# Altium PCB PCB1.PcbDoc
Units mm, origin at the board's own origin, x right, y up, seen from the top; angles counter-clockwise.
Board outline 100 x 100 mm, 4 copper layers (Top Layer, Internal Plane 1, Internal Plane 2, Bottom Layer), stack 0.462 mm thick; 31 components, 16 nets, 101 pads, 0 vias.
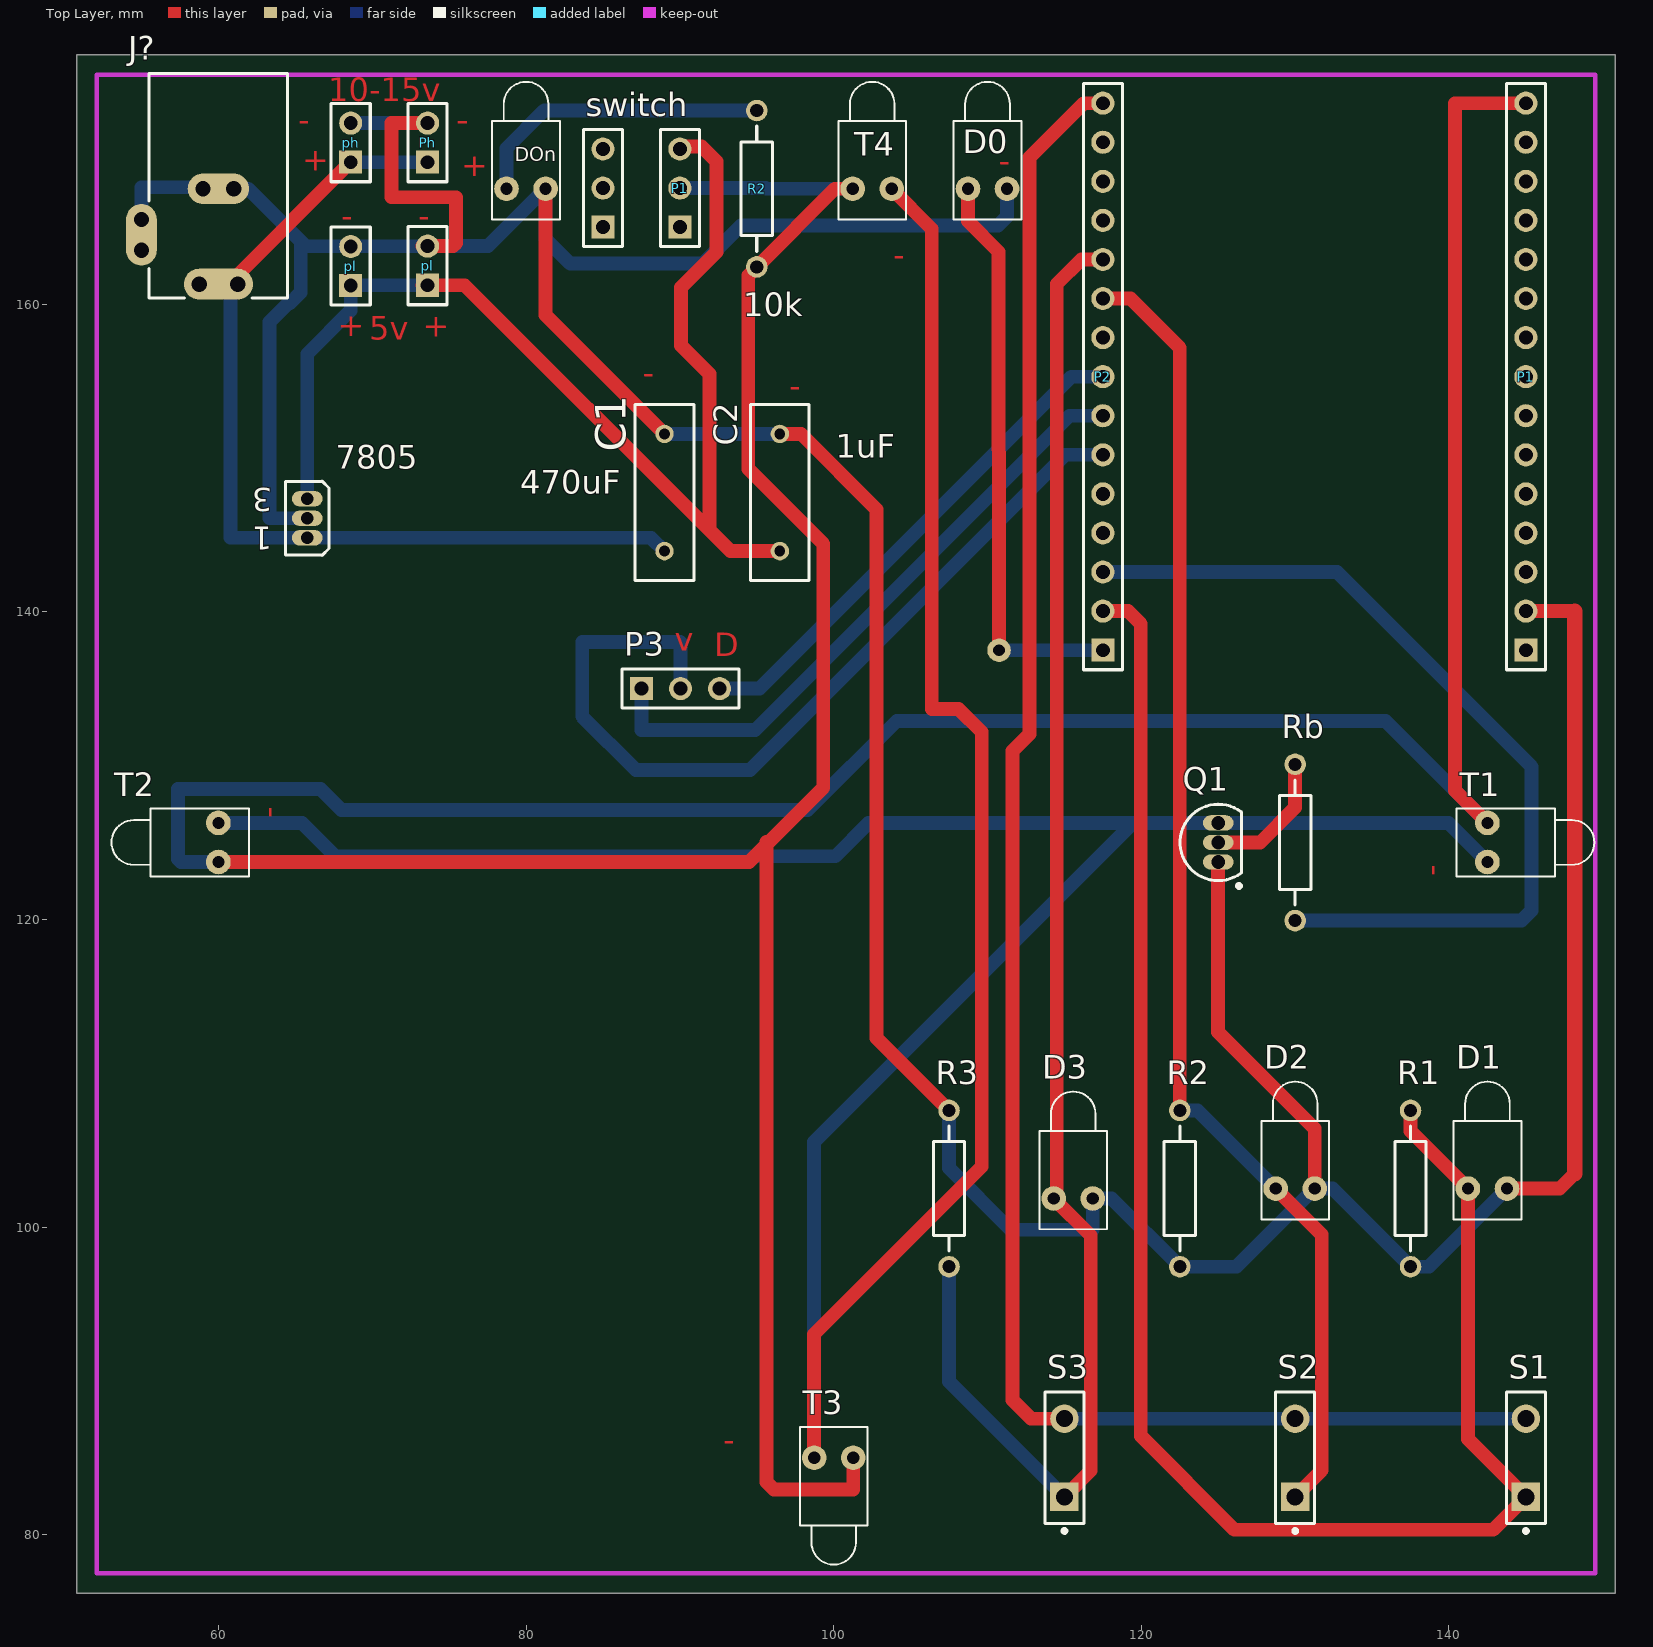
[diagram p0: Top Layer view]
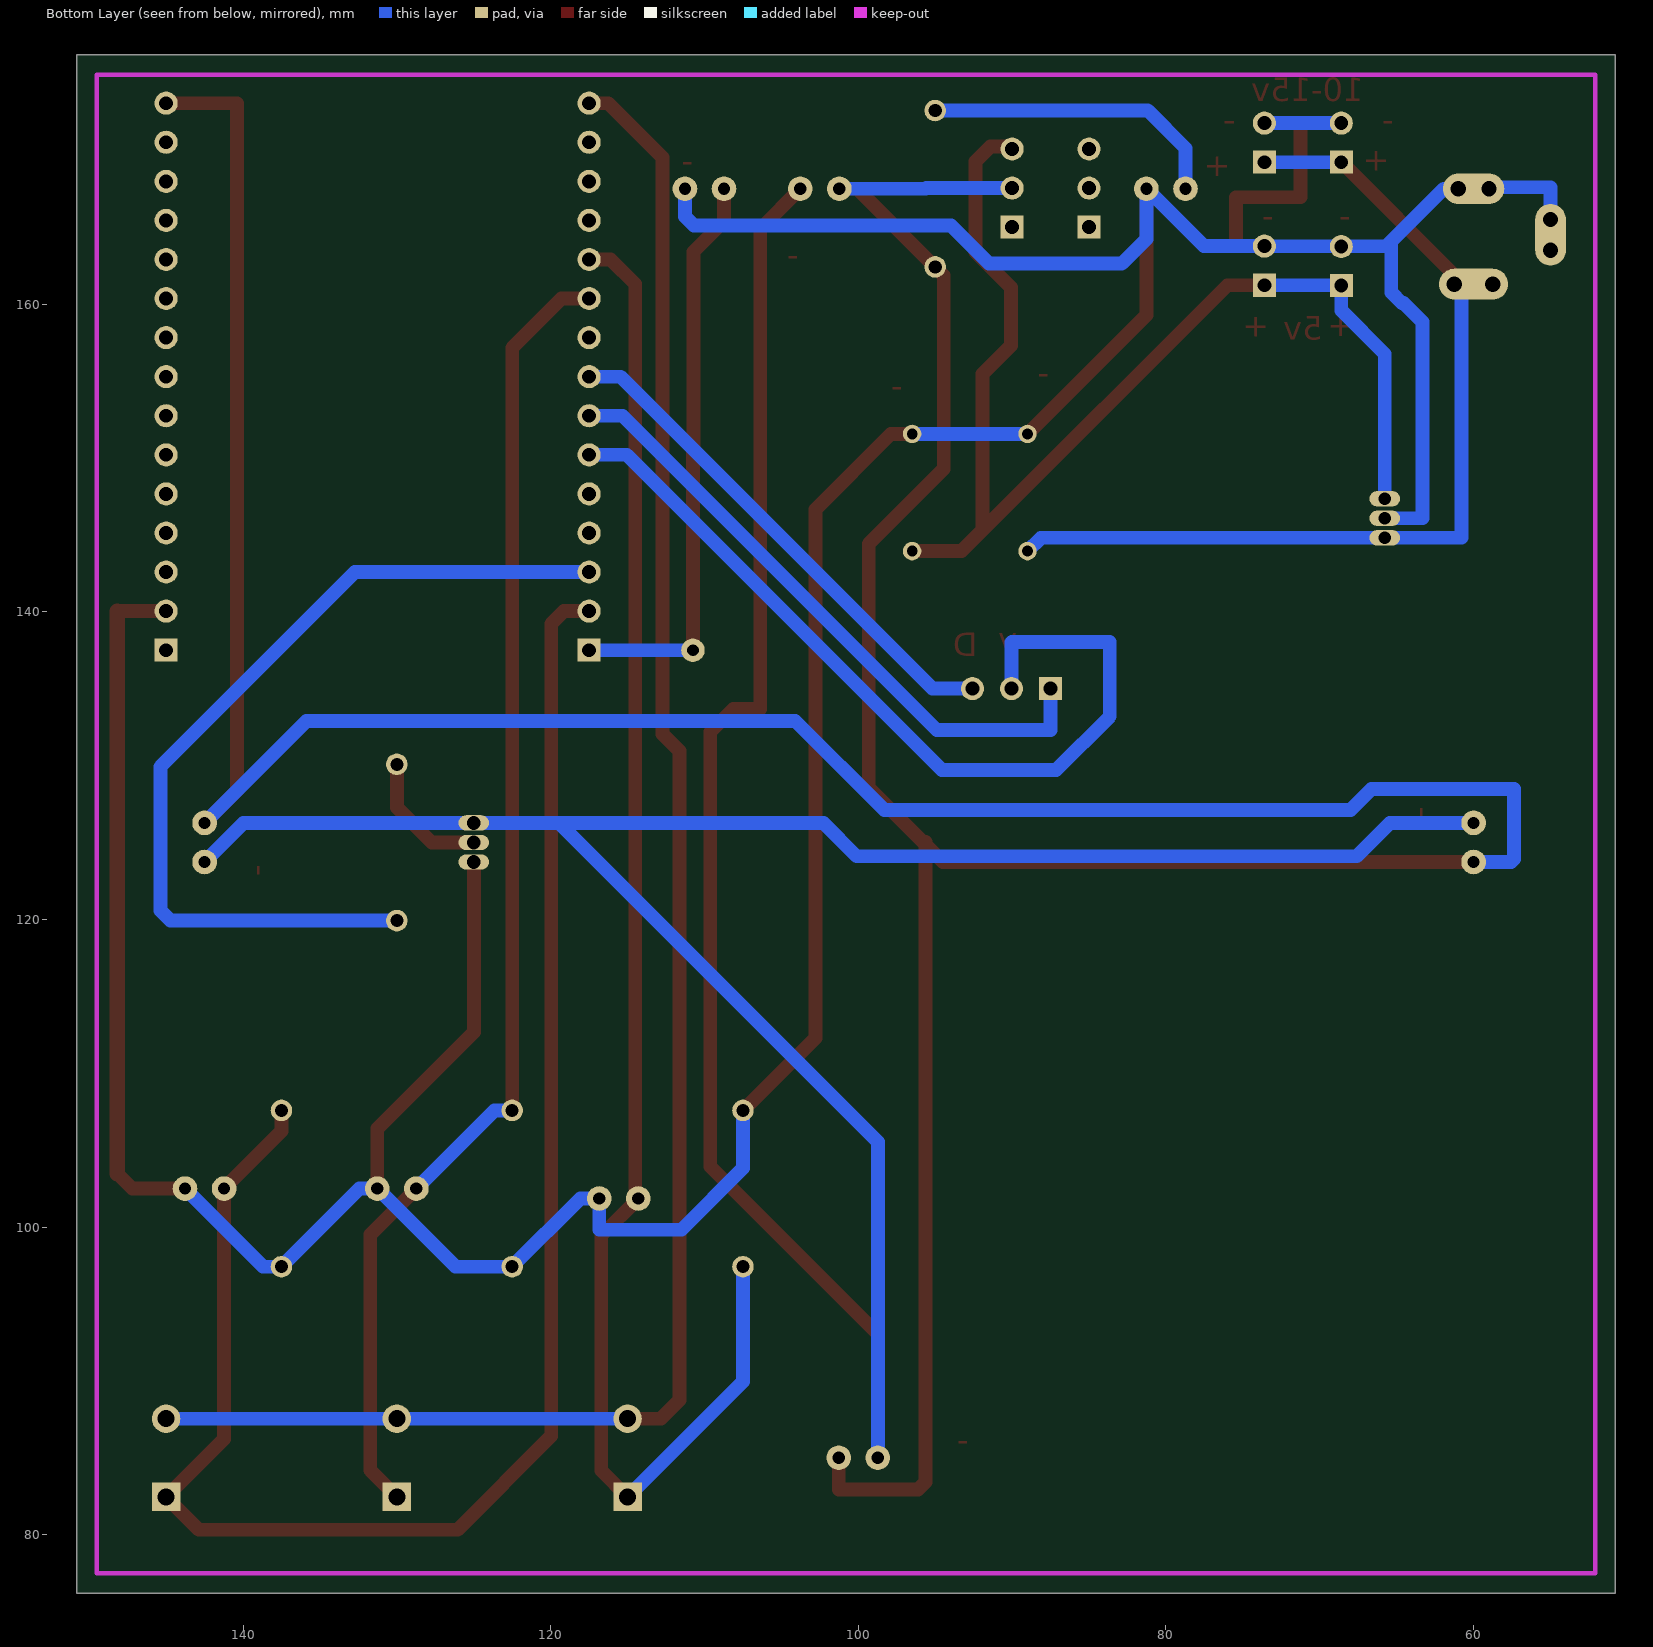
[diagram p1: Bottom Layer view, seen from below]
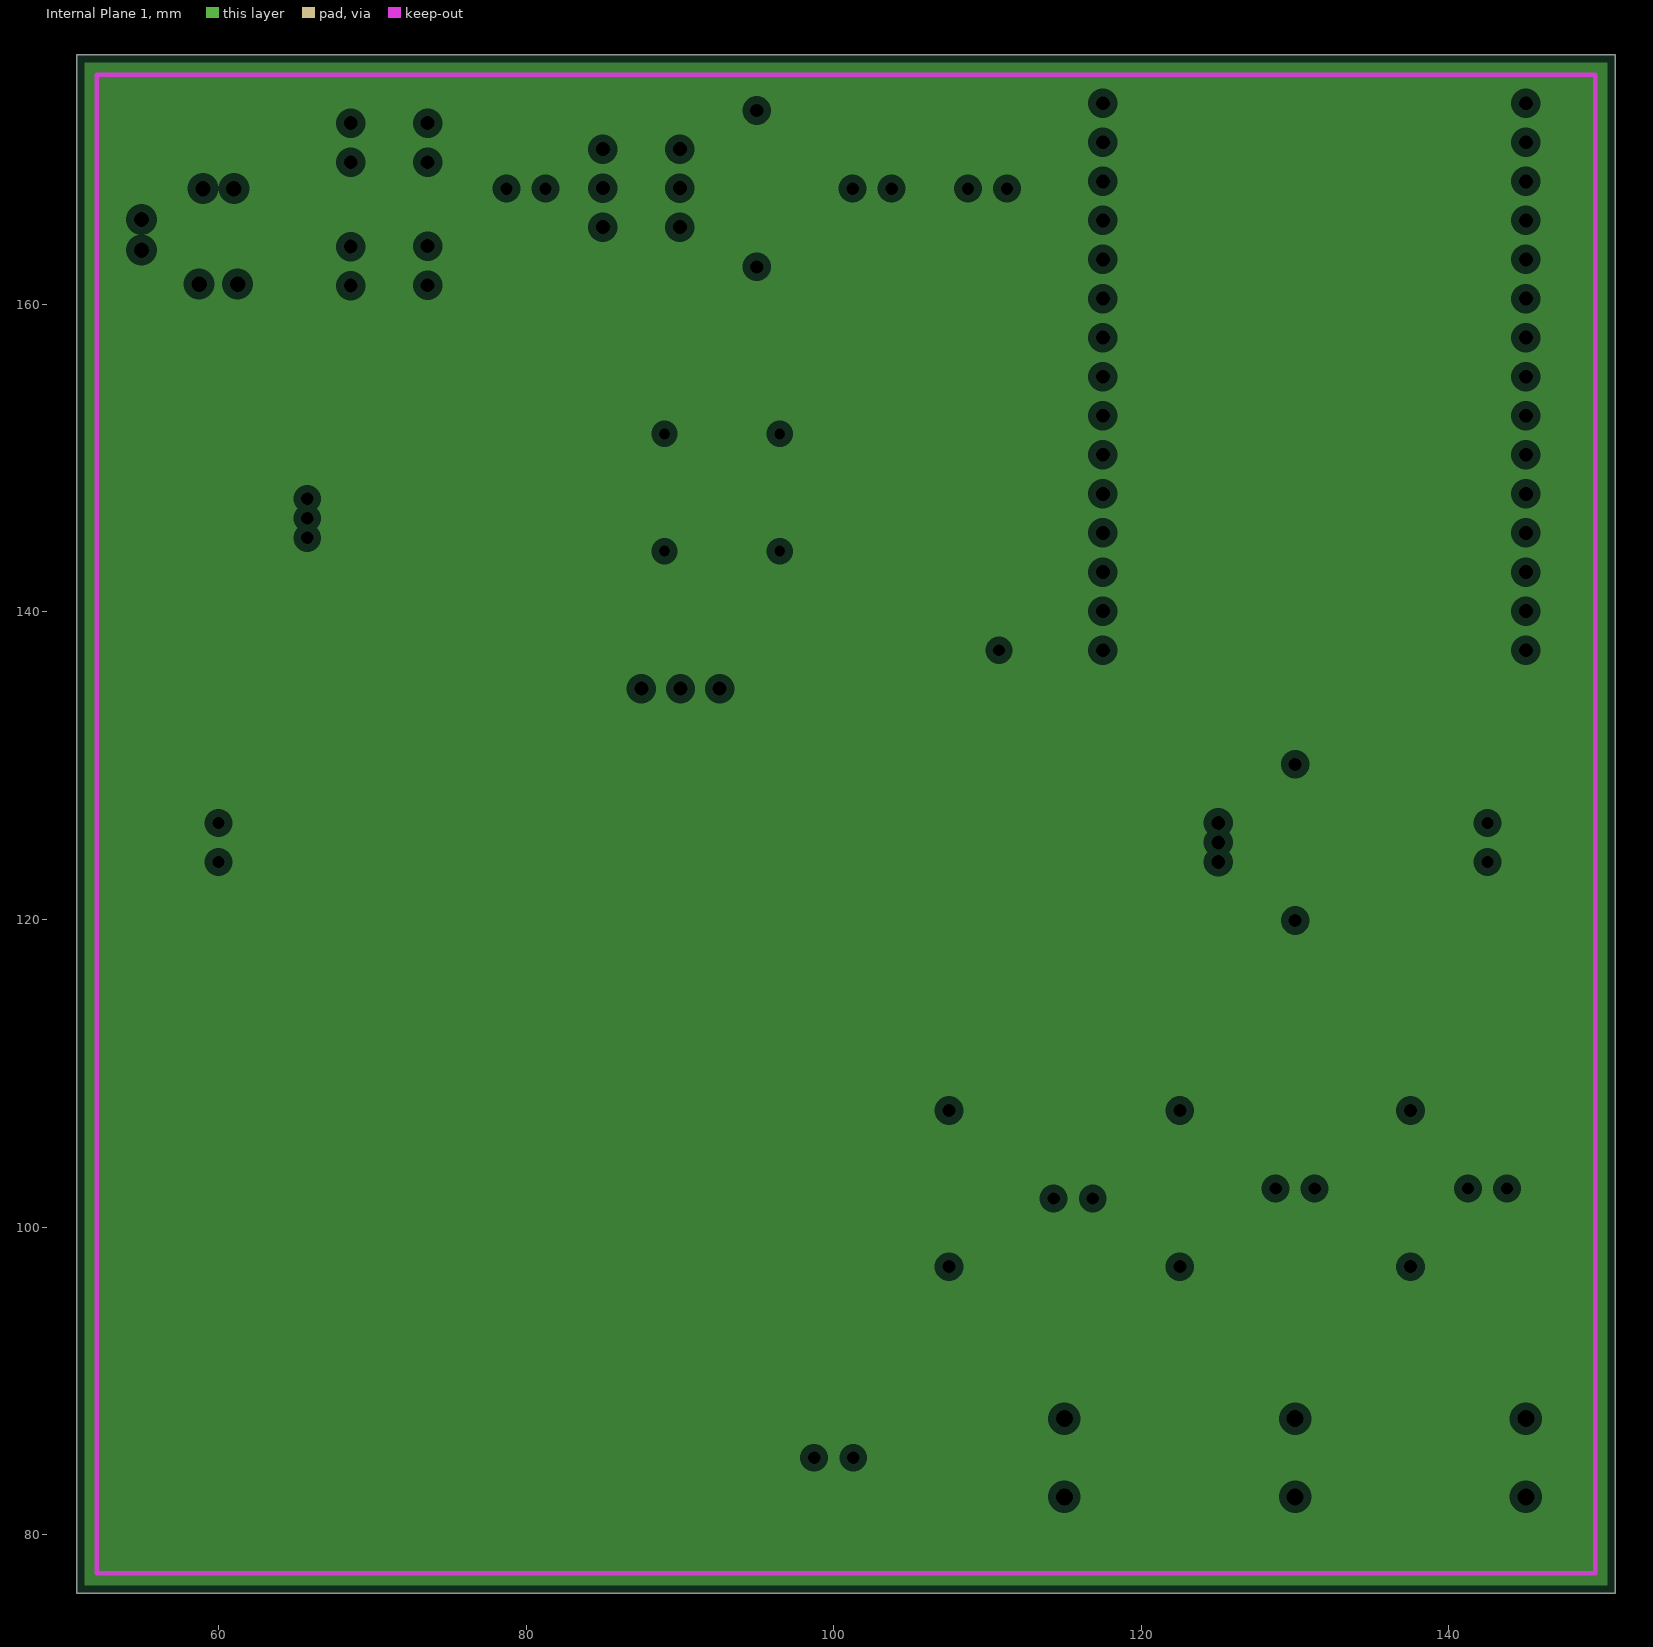
[diagram p2: Internal Plane 1, clearances drawn from the general rule]
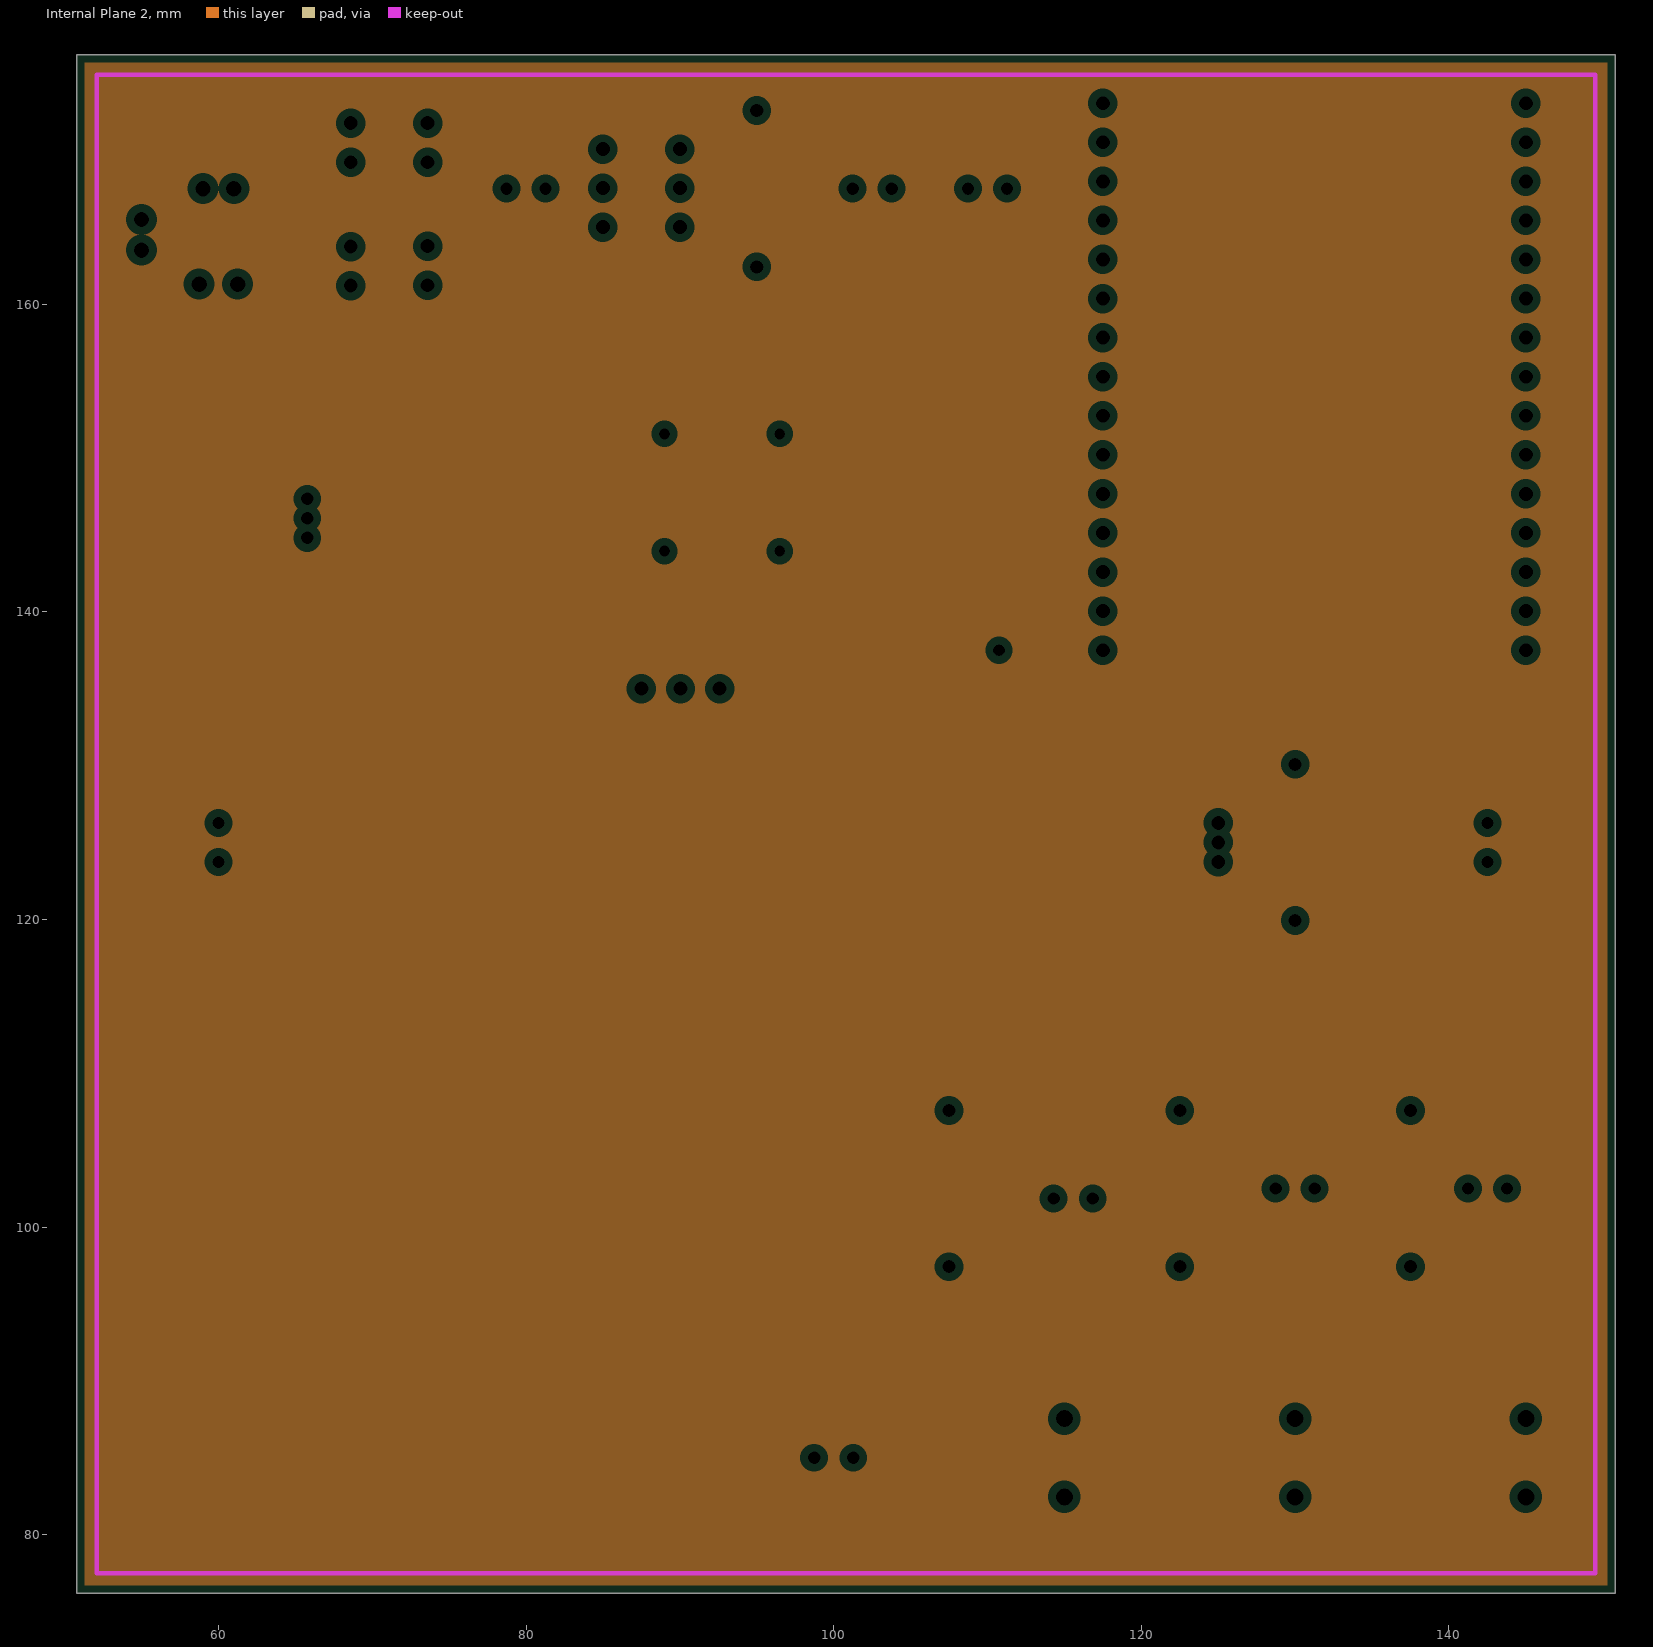
[diagram p3: Internal Plane 2, clearances drawn from the general rule]

## Layer stack, top to bottom
Top Solder: solder mask 0.0102, Solder Resist, Dk 3.5
Top Layer: signal copper 0.0356
Internal Plane 1: plane copper 0.0356
Internal Plane 2: plane copper 0.0356
Dielectric 1: dielectric 0.32, FR-4, Dk 4.8
Bottom Layer: signal copper 0.0356
Bottom Solder: solder mask 0.0102, Solder Resist, Dk 3.5

## Board outline
50.8,76.2 150.8,76.2 150.8,176.2 50.8,176.2

## Design rules (kind name [scope] priority, off if disabled: settings)
Clearance [All] p1: gap=0.2
PlaneClearance [All] p1: clearance=0.508
PlaneConnect [All] p1: planeconnectstyle=Relief reliefexpansion=0.508 reliefentries=4 reliefconductorwidth=0.254 reliefairgap=0.254
PolygonConnect [All] p1: connectstyle=Relief reliefconductorwidth=0.254 reliefentries=4 polygonreliefangle="90 Angle" airgapwidth=0.254
RoomDefinition Sheet1 [InComponentClass('Sheet1')] p1: confinementstyle=ConfineIn formatcopy=TRUE lockcomponents=FALSE outline 162.5,62.775 35.475,62.775 35.475,181.102 162.5,181.102
RoutingVias [All] p1: holewidth=0.8 width=1.6 viastyle="Through Hole" minholewidth=0.711 minwidth=1.27 maxholewidth=0.711 maxwidth=1.27
SolderMaskExpansion [All] p1: expansion=0.102
Width [All] p1: maxlimit=1 minlimit=0.8 preferedwidth=0.9
28 further rules are at their usual default settings.

## Classes and differential pairs
component class Sheet1: 1N5338BRL 470uf 7805 C1 C2 D0 D1 D2 D3 DOn J? P1 P3 Ph pl Q1 R1 R2 R3 Rb S1 S2 S3 switch T1 T2 T3 T4

## Components (designator, comment, footprint, x,y, rotation, side; value= is the part's Value field where it differs from the comment)
7805 "MOSFET-N" E3 65.775,146.075 r180 top
C1 "470uF" RAD-0.3 89,147.75 r90 top
C2 "1uF" RAD-0.3 96.5,147.75 r90 top
D0 "LED1" LED-1 110,167.5 r90 top
D1 "LED1" LED-1 142.5,102.5 r90 top
D2 "LED1" LED-1 130,102.5 r90 top
D3 "LED1" LED-1 115.57,101.854 r90 top
DOn "LED1" LED-1 80,167.5 r90 top
J? "PWR2.5" KLD-0202 60,175 r270 top
P1 "Header 15" HDR1X15 145,137.5 r90 top
P1 "uf" HDR1X3 90,165 r90 top
P2 "Header 15" HDR1X15 117.5,137.5 r90 top
P3 "IrRECV" HDR1X3 87.5,135 r0 top
Ph "Header 2" HDR1X2 73.6,169.225 r90 top
ph "Header 2" HDR1X2 68.6,169.225 r90 top
pl "Header 2" HDR1X2 73.6,161.225 r90 top
pl "Header 2" HDR1X2 68.6,161.2 r90 top
Q1 "2N3904" TO-92A 125,125 r0 top
R1 "Res2" AXIAL-0.4 137.5,102.5 r90 top
R2 "Res2" AXIAL-0.4 122.5,102.5 r90 top
R2 "10k" AXIAL-0.4 95,167.5 r90 top
R3 "Res2" AXIAL-0.4 107.5,102.5 r90 top
Rb "Res2" AXIAL-0.4 130,125 r90 top
S1 "SW-PB" SPST-2 145,85 r90 top
S2 "SW-PB" SPST-2 130,85 r90 top
S3 "SW-PB" SPST-2 115,85 r90 top
switch "ul" HDR1X3 85,165 r90 top (schematic designator P2)
T1 "LED1" LED-1 142.5,125 r0 top (schematic designator DT1)
T2 "LED1" LED-1 60,125 r180 top (schematic designator DT2)
T3 "LED1" LED-1 100,85 r270 top (schematic designator DT3)
T4 "LED1" LED-1 102.5,167.5 r90 top (schematic designator DT4)

## Footprints (in the part's own frame and the unit in brackets; to place one, negate y for a bottom-side part, rotate by r counter-clockwise, add the part's x,y. Pads: shape width x height; smd on the part's side, far side on the other; paste and mask are expansions set on the pad)
AXIAL-0.4 [mm] "Axial Device, Thru-Hole; 2 Leads; 0.4 in Pin Spacing"
  round 1.4 hole 0.85: 1(-5.08,0) 2(5.08,0)
  silkscreen extent -4.06,-1.02 4.06,1.02
E3 [mm] "TO, Flat Index; 3 In-Line, Axial Leads; Body Dia. 4.6mm; Lead Dia. 0.5 mm (max)"
  oval 2x1 hole 0.8: 1(0,1.27) 2(0,0) 3(0,-1.27)
  silkscreen extent -1.41,-2.41 1.41,2.41
HDR1X2 [mm] "Connector; Header; 2 Position"
  rect 1.5x1.5 hole 0.9: 1(0,0)
  round 1.5 hole 0.9: 2(2.54,0)
  silkscreen extent -1.27,-1.27 3.81,1.27
HDR1X3 [mm] "Connector; Header; 3 Position"
  rect 1.5x1.5 hole 0.9: 1(0,0)
  round 1.5 hole 0.9: 2(2.54,0) 3(5.08,0)
  silkscreen extent -1.27,-1.27 6.35,1.27
HDR1X15 [mm] "Connector; Header; 15 Position"
  rect 1.5x1.5 hole 0.9: 1(0,0)
  round 1.5 hole 0.9: 2(2.54,0) 3(5.08,0) 4(7.62,0) 5(10.16,0) 6(12.7,0) 7(15.24,0) 8(17.78,0) 9(20.32,0) 10(22.86,0) 11(25.4,0) 12(27.94,0) 13(30.48,0) 14(33.02,0) 15(35.56,0)
  silkscreen extent -1.27,-1.27 36.83,1.27
KLD-0202 [mm] "DC Power Jack, 2.5mm, KLD Series, PCB Mount"
  oval 2x4.5 all layers, no hole: 1(13.7,0)
  round 1.5 hole 1: 1A(13.7,-1.25) 1B(13.7,1.25) 2A(7.5,-1) 2B(7.5,1) 3A(9.5,-5) 3B(11.5,-5)
  oval 2x4 all layers, no hole: 2(7.5,0)
  oval 4x2 all layers, no hole: 3(10.5,-5)
  silkscreen extent 0,-4.5 14.6,4.5
LED-1 [mm] "LED; 2 Leads"
  round 1.6 hole 0.8: 1(0,1.27) 2(0,-1.27)
  silkscreen extent -2,-2.2 6.95,2.2
RAD-0.3 [mm] "Radial Cap, Thru-Hole; 2 Leads; 0.3 in Pin Spacing"
  round 1.2 hole 0.7: 1(-3.81,0) 2(3.81,0)
  silkscreen extent -5.72,-1.91 5.71,1.9
SPST-2 [mm] "Switch; 2 Leads"
  rect 1.85x1.85 hole 1.1: 1(-2.54,0)
  round 1.85 hole 1.1: 2(2.54,0)
  silkscreen extent -4.89,-1.27 4.28,1.27
TO-92A [mm] "TO, Flat Index; 3 In-Line, Axial Leads; Body Dia. 4.5mm; Leads 0.51 x 0.48 mm (max)"
  oval 2x1 hole 0.9: 1(0,-1.27) 2(0,0) 3(0,1.27)
  silkscreen extent -2.48,-2.95 1.5,2.48, body extent -2.5,-2.5 1.5,2.5, height 6.86

## Part data
7805: "N-Channel MOSFET"
C1 C2: library part Cap, "Capacitor"
D0 D1 D2 D3 DOn T1 T2 T3 T4: "Typical RED GaAs LED"
J?: "Low Voltage Power Supply Connector"
P1 P2: "Header, 15-Pin"
P1 P3 switch: library part "Header 3", "Header, 3-Pin"
Ph ph pl pl: "Header, 2-Pin"
Q1: "NPN General Purpose Amplifier"
R1 R2 R3 Rb: "Resistor"
R2: library part Res2, "Resistor"
S1 S2 S3: "Switch"

## Free pads (board coordinates)
  round 1.524 hole 0.762: 2(110.75,137.5)

## Nets (pads, with @x,y where several pads share a name; then routed paths per layer and width w, separated by ;. In a path a pad name is that pad's centre, name@x,y a point inside that pad or via, vN(x,y) a via of type N, cw(c..) or ccw(c..) an arc to the next point about the centre after c; other vN are vias at no path point)
GND: 7805.2 C1.2 C2.2 D0.2 D1.2 D2.2 D3.2 DOn.2 J?.2 J?.2A J?.2B J?.3 J?.3A J?.3B P1.2@145,140.04 Ph.2 ph.2 pl.2 Q1.1 R1.1 R2.1@122.5,97.42 R3.2 | length 309.6
  Top Layer w0.9: J?.2A J?.2 J?.2B ; pl.2@73.25,163.765 75.265,163.765 75.45,163.95 75.45,166.95 71.25,166.95 71.25,171.765 Ph.2 ; DOn.2 81.27,159.29 C1.2 ; C2.2 97.89,151.56 102.794,146.656 102.794,112.286 R3.2 ; Q1.1 124.993,123.73 124.993,112.682 131.27,106.405 D2.2 ; D1.2 147.2,102.5 148.175,103.475 ; P1.2@145,140.04 148.175,140.04
  Top Layer w1: 148.175,103.475 148.175,140.04
  Bottom Layer w0.9: J?.3A 55,167.6 J?.2A@58.9,167.6 ; J?.2A J?.2 J?.2B 61.938,167.5 65.35,164.088 ; 7805.2 63.325,146.075 63.325,158.84 64.556,160.071 64.671,160.071 65.35,160.75 65.35,164.088 ; ph.2 Ph.2 ; C1.2 92.735,151.56 C2.2 ; R3.2 107.5,103.825 111.503,99.822 116.84,99.822 D3.2 118.066,101.854 122.5,97.42 126.19,97.42 D2.2 132.42,102.5 R1.1 138.69,97.42 D1.2 ; D0.2 111.27,165.695 110.675,165.1 93.975,165.1 91.505,162.63 82.87,162.63 81.27,164.23 DOn.2 77.535,163.765 73.6,163.765 68.6,163.74 65.672,163.765 65.35,164.088
Net7805_1: 7805.1 C1.1 J?.1 J?.1A J?.1B Ph.1 ph.1 | length 63.7
  Top Layer w0.9: J?.1B 61.25,161.875 ph.1
  Bottom Layer w0.9: J?.1A J?.1 J?.1B 60.78,160.83 60.78,144.805 7805.1 88.135,144.805 C1.1 ; ph.1 Ph.1
Net7805_3: 7805.3 C2.1 P1.3@90,170.08 pl.1 | length 79
  Top Layer w0.9: 7805.3@65.761,147.345 7805.3 ; pl.1@73.25,161.225 76.011,161.225 91.925,145.311 ; P1.3@90,170.08 90.17,170.25 91.4,170.25 92.375,169.275 92.375,163.375 90.075,161.075 90.075,157.3 91.925,155.45 91.925,145.311 ; C2.1 93.296,143.94 91.925,145.311
  Bottom Layer w0.9: 7805.3 65.775,156.75 68.6,159.575 68.6,161.225 pl.1@73.6,161.225
NetD0_1: D0.1 P2.1 pad.2 | length 37.6
  Top Layer w0.9: D0.1 108.73,165.395 110.725,163.4 pad.2
  Bottom Layer w0.9: pad.2 P2.1
NetD1_1: D1.1 P2.2 R1.2 S1.1 | length 112.3
  Top Layer w0.9: P2.2 119.135,140.04 119.964,139.211 119.964,86.411 126.06,80.315 142.855,80.315 S1.1 141.23,86.23 D1.1 137.5,106.23 R1.2
NetD2_1: D2.1 P2.10 R2.2@122.5,107.58 S2.1 | length 86.2
  Top Layer w0.9: P2.10 119.29,160.36 122.5,157.15 R2.2@122.5,107.58 ; D2.1 131.724,99.506 131.724,84.184 S2.1
  Bottom Layer w0.9: R2.2@122.5,107.58 123.65,107.58 D2.1
NetD3_1: D3.1 P2.11 R3.1 S3.1 | length 102.4
  Top Layer w0.9: S3.1 116.713,84.173 116.713,99.441 D3.1 114.5,102.054 114.5,161.3 116.1,162.9 P2.11
  Bottom Layer w0.9: R3.1 107.5,89.96 S3.1
NetDOn_1: DOn.1 R2.2@95,172.58 | length 19.9
  Bottom Layer w0.9: DOn.1 78.73,170.13 81.18,172.58 R2.2@95,172.58
NetDT1_1: P1.2@90,167.54 P1.15 R2.1@95,162.42 T1.1 T2.1 T3.1 T4.1 | length 296.9
  Top Layer w0.9: T2.1 94.495,123.73 99.325,128.56 99.325,144.413 94.45,149.288 94.45,161.87 95,162.42 100.08,167.5 T4.1 ; 95.625,125.025 95.625,83.425 96.119,82.931 101.27,82.931 T3.1 ; T1.1 140.4,128.37 140.4,173.06 P1.15
  Bottom Layer w0.9: T2.1 57.57,123.73 57.375,123.925 57.375,128.473 66.627,128.473 68,127.1 98.3,127.1 104.1,132.9 135.87,132.9 T1.1 ; P1.2@90,167.54 95.58,167.54 95.62,167.5 T4.1
NetDT1_2: Q1.3 T1.2 T2.2 T3.2 T4.2 | length 225.7
  Top Layer w0.9: T3.2 98.73,93.03 109.625,103.925 109.625,132.175 108.125,133.675 106.375,133.675 106.375,164.895 T4.2
  Bottom Layer w0.9: T2.2 65.43,126.27 67.6,124.1 100.1,124.1 102.27,126.27 Q1.3 139.96,126.27 T1.2 ; T3.2 98.73,105.53 119.47,126.27
NetP2_3: P2.3 Rb.1 | length 58.1
  Bottom Layer w0.9: P2.3 132.72,142.58 145.375,129.925 145.375,120.575 144.72,119.92 Rb.1
NetP2_6: P2.6 P3.2 | length 58
  Bottom Layer w0.9: P3.2 90.04,138.01 90.025,138.025 83.65,138.025 83.65,133.2 87.15,129.7 94.55,129.7 115.05,150.2 P2.6
NetP2_7: P2.7 P3.1 | length 41.2
  Bottom Layer w0.9: P3.1 87.5,132.3 94.9,132.3 115.34,152.74 P2.7
NetP2_8: P2.8 P3.3 | length 33.3
  Bottom Layer w0.9: P3.3 95.175,135 115.455,155.28 P2.8
NetP2_15: P2.15 S1.2 S2.2 S3.2 | length 121.3
  Top Layer w0.9: S3.2 112.835,87.54 111.625,88.75 111.625,130.95 112.725,132.05 112.725,169.525 116.26,173.06 P2.15
  Bottom Layer w0.9: S3.2 S2.2 S1.2
NetQ1_2: Q1.2 Rb.2 | length 8.8
  Top Layer w0.9: Q1.2 127.73,125 130,127.27 Rb.2
pads on no net: P1.1 P1.3@145,142.58 P1.4 P1.5 P1.6 P1.7 P1.8 P1.9 P1.10 P1.11 P1.12 P1.13 P1.14 P2.4 P2.5 P2.9 P2.12 P2.13 P2.14 switch.1 switch.2 switch.3

## Keep-outs
Keep-Out Layer:
  lines w0.3: 52.1,77.5 149.5,77.5 149.5,174.9 52.1,174.9 52.1,77.5

## Other copper
Top Layer:
  text "10-15v" at 67.125,173.2 h1.52
  text "-" at 65.175,171.25 h1.52
  text "-" at 75.45,171.25 h1.52
  text "-" at 75.525,171.25 h1.52
  text "+" at 65.45,168.675 h1.52
  text "-" at 110.725,168.575 h1.52
  text "+" at 75.8,168.3 h1.52
  text "-" at 68,165 h1.52
  text "-" at 73,165 h1.52
  text "-" at 103.875,162.475 h1.52
  text "+" at 67.75,157.9 h1.52
  text "+" at 73.275,157.875 h1.52
  text "5v" at 69.8,157.675 h1.52
  text "-" at 87.575,154.775 h1.52
  text "-" at 97.125,153.95 h1.52
  text "v" at 89.675,137.475 h1.52
  text "D" at 92.225,137.1 h1.52
  text "-" at 63.95,126.575 h1.52 r90
  text "-" at 139.575,122.8 h1.52 r90
  text "-" at 92.825,85.425 h1.52

## Silkscreen, mask and mechanical layers (free items; w line width, h text height)
Drill Drawing:
  text "Drill Drawing." at 155.88,78.74 h1.52

## Dimensions
52.1,77.5 to 52.1,174.9 on Mechanical 1
51.084,75.976 to 148.484,75.976 on Mechanical 1

## Text inside footprints (layer, text, board x,y; h text height)
7805: Top Overlay "3" at 63.5,148.038 h1.5 r180; Top Overlay "1" at 63.5,145.52 h1.5 r180